# Altium PCB STM32F103C8T6核心板尺寸.PcbDoc
Units mil, origin at the board's own origin, x right, y up, seen from the top; angles counter-clockwise.
Board outline 2100 x 900 mil, 2 copper layers (Top Layer, Bottom Layer); 13 components, 0 nets, 125 pads, 0 vias.
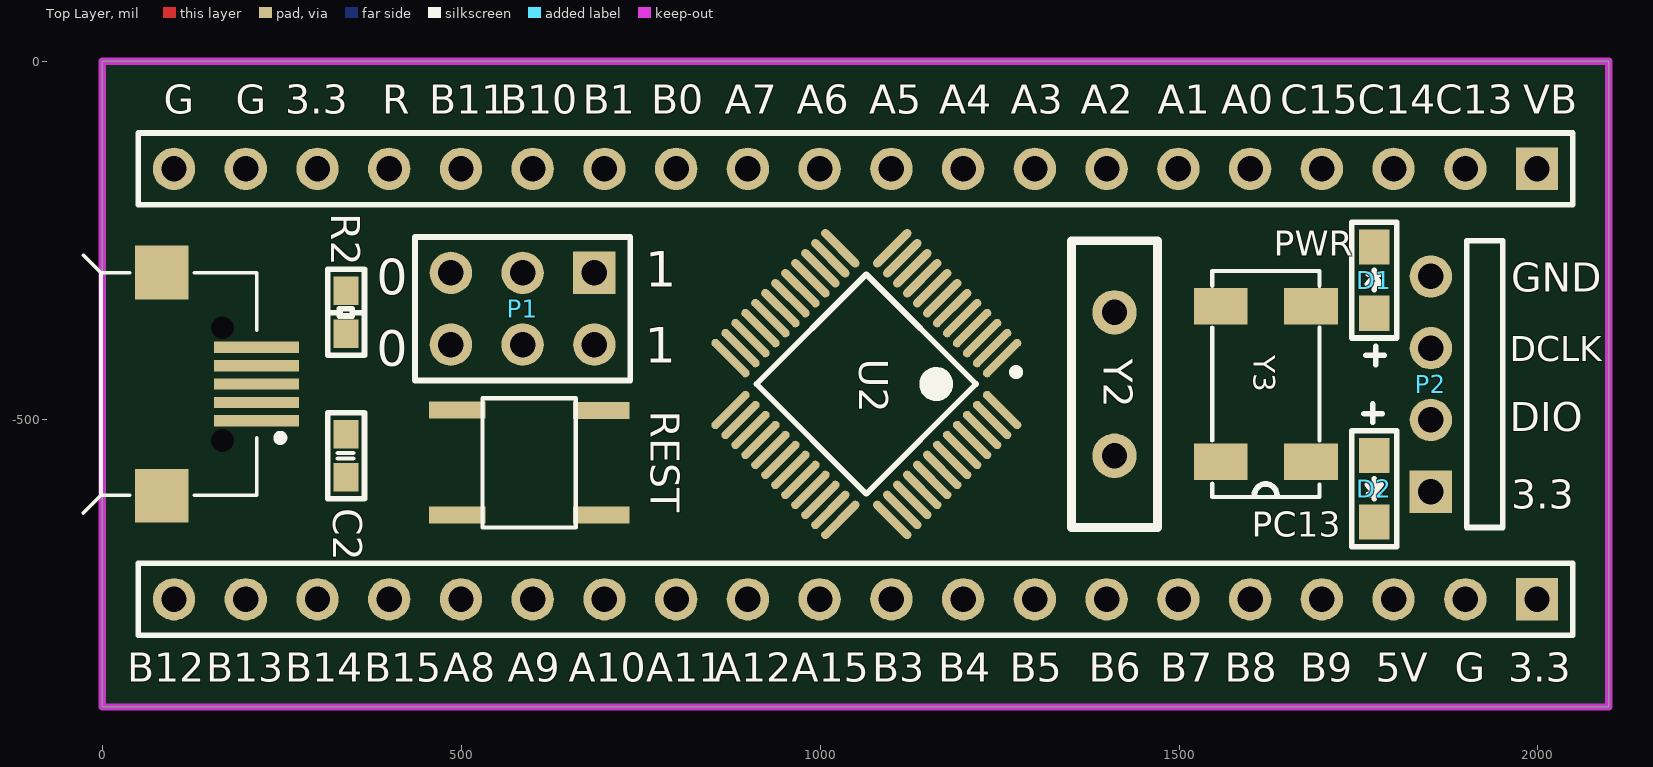
[diagram p0: Top Layer view]
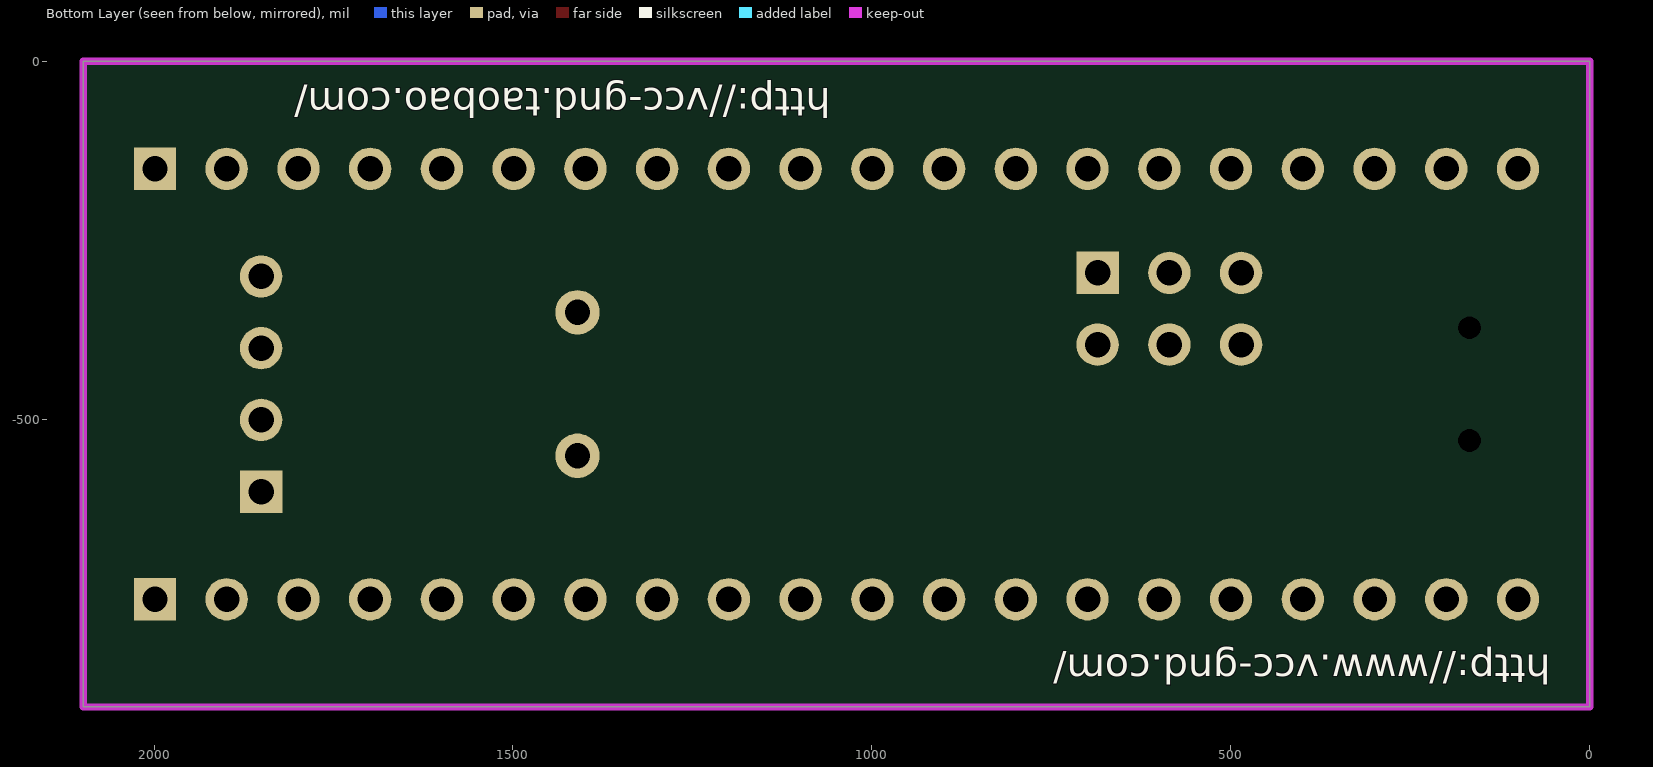
[diagram p1: Bottom Layer view, seen from below]

## Layer stack, top to bottom
Top Layer: signal copper 1.4
Dielectric: dielectric 12.6, FR-4, Dk 4.8
Bottom Layer: signal copper 1.4

## Board outline
1317,-900 -1,-900 -1,-198 -1,0 2098,0 2099,0 2099,-29 2099,-900 1768,-900

## Design rules (kind name [scope] priority, off if disabled: settings)
Clearance [All] p1: gap=6
FabricationTestPointUsage TestPointUsage [All] p1: valid=0 allowmultiple=FALSE
FabricationTestpoint Testpoint [(IsPad And (OnTopLayer Or OnBottomLayer))] p1: side=3 testpointundercomponent=TRUE minsize=40 maxsize=100 preferedsize=60 minholesize=0 maxholesize=40 preferedholesize=32 testpointgrid=1 allowsidetop=TRUE allowsidebottom=TRUE usegrid=TRUE gridtolerance=0.01
HoleToHoleClearance [All] p1: gap=0 allowstackedmicrovias=TRUE
MinimumSolderMaskSliver [All] p1: minsoldermaskwidth=0
PolygonConnect PolygonConnect_1 [All vs (InPadClass('All Pads'))] p1: connectstyle=Relief reliefconductorwidth=20 reliefentries=4 polygonreliefangle="90 Angle" airgapwidth=10
PolygonConnect [All] p2: connectstyle=Direct reliefconductorwidth=20 reliefentries=4 polygonreliefangle="90 Angle" airgapwidth=10
RoutingVias [All] p1: holewidth=15 width=30 viastyle="Through Hole" minholewidth=10 minwidth=20 maxholewidth=50 maxwidth=100
SilkToSilkClearance [All] p1: silktosilkclearance=0
SilkscreenOverComponentPads [All] p1: minsilkscreentomaskgap=0
SolderMaskExpansion [All] p1: expansion=4
Width [All] p1: maxlimit=50 minlimit=10 preferedwidth=10 minimp=50.000000 maximp=50.000000 favimp=50.000000
22 further rules are at their usual default settings.

## Components (designator, comment, footprint, x,y, rotation, side; value= is the part's Value field where it differs from the comment)
C2 "105" C0603 339,-550 r270 top
D1 "LED" LED 1772,-305 r270 top
D2 "LED" LED 1772,-596 r90 top
P1 "Header 3X2" HDR2X3 685,-295 r180 top
P2 "SWD" HDR1X4H 1851,-600 r90 top
P3 "Header 20" HDR1X20 1999,-150 r180 top
P4 "Header 20" HDR1X20 1999,-750 r180 top
R2 "10K" R0603 339,-350 r270 top
REST "" KEY-SMT 594,-560 r180 top (schematic designator SW1)
U2 "STM32F103C8T6" 48P 1064,-450 r225 top locked
Y2 "8MHz" XTAL1 1410,-550 r90 top
Y3 "32.768K" MC-306 1621,-450 r90 top (schematic designator Y1)
? "Comment" Micro_USB 148,-450 r270 top locked

## Footprints (in the part's own frame and the unit in brackets; to place one, negate y for a bottom-side part, rotate by r counter-clockwise, add the part's x,y. Pads: shape width x height; smd on the part's side, far side on the other; paste and mask are expansions set on the pad)
48P [mm]
  oval 1.8x0.3 smd: 1(-4.05,2.75) 2(-4.05,2.25) 3(-4.05,1.75) 4(-4.05,1.25) 5(-4.05,0.75) 6(-4.05,0.25) 7(-4.05,-0.25) 8(-4.05,-0.75) 9(-4.05,-1.25) 10(-4.05,-1.75) 11(-4.05,-2.25) 12(-4.05,-2.75) 25(4.05,-2.75) 26(4.05,-2.25) 27(4.05,-1.75) 28(4.05,-1.25) 29(4.05,-0.75) 30(4.05,-0.25) 31(4.05,0.25) 32(4.05,0.75) 33(4.05,1.25) 34(4.05,1.75) 35(4.05,2.25) 36(4.05,2.75)
  oval 0.3x1.8 smd: 13(-2.75,-4.05) 14(-2.25,-4.05) 15(-1.75,-4.05) 16(-1.25,-4.05) 17(-0.75,-4.05) 18(-0.25,-4.05) 19(0.25,-4.05) 20(0.75,-4.05) 21(1.25,-4.05) 22(1.75,-4.05) 23(2.25,-4.05) 24(2.75,-4.05) 37(2.75,4.05) 38(2.25,4.05) 39(1.75,4.05) 40(1.25,4.05) 41(0.75,4.05) 42(0.25,4.05) 43(-0.25,4.05) 44(-0.75,4.05) 45(-1.25,4.05) 46(-1.75,4.05) 47(-2.25,4.05) 48(-2.75,4.05)
  silkscreen extent -4.17,-2.75 2.75,3.57, body extent -3.5,-3.5 3.5,3.5, height 1.6
C0603 [mil]
  rect 40x35 smd: 1(-29.92,0) 2(29.92,0)
  silkscreen extent -60,-26 60,26
HDR1X4H [mm] "Connector; Header; 4 Position; Right Angle"
  rect 1.5x1.5 hole 0.9: 1(0,0)
  round 1.5 hole 0.9: 2(2.54,0) 3(5.08,0) 4(7.62,0)
  silkscreen extent -1.27,-2.54 8.89,-1.27
HDR1X20 [mm] "Connector; Header; 20 Position"
  rect 1.5x1.5 hole 0.9: 1(0,0)
  round 1.5 hole 0.9: 2(2.54,0) 3(5.08,0) 4(7.62,0) 5(10.16,0) 6(12.7,0) 7(15.24,0) 8(17.78,0) 9(20.32,0) 10(22.86,0) 11(25.4,0) 12(27.94,0) 13(30.48,0) 14(33.02,0) 15(35.56,0) 16(38.1,0) 17(40.64,0) 18(43.18,0) 19(45.72,0) 20(48.26,0)
  silkscreen extent -1.27,-1.27 49.53,1.27
HDR2X3 [mm] "Connector; Header; 3x2 Position"
  rect 1.5x1.5 hole 0.9: 1(0,0)
  round 1.5 hole 0.9: 2(0,2.54) 3(2.54,0) 4(2.54,2.54) 5(5.08,0) 6(5.08,2.54)
  silkscreen extent -1.27,-1.27 6.35,3.81
KEY-SMT [mm]
  rect 2x0.6 smd: 1(-2.55,-1.85) 1(2.55,-1.87) 2(-2.55,1.85) 2(2.55,1.85)
  silkscreen extent -1.65,-2.29 1.65,2.29
LED [mil]
  rect 49x43 smd: 1(46.26,0) 2(-46.26,0)
  silkscreen extent -81,-31 118,31
MC-306 [mm]
  rect 1.3x1.9 smd: 1(-2.75,-1.6) 2(2.75,-1.6) 3(2.75,1.6) 4(-2.75,1.6)
  silkscreen extent -4,-1.9 4,1.9
Micro_USB [mm]
  rect 0.4x3 smd: 1(1.3,1.679) 2(0.65,1.679) 3(0,1.679) 4(-0.65,1.679) 5(-1.3,1.679)
  round 0 hole 0.8 unplated: MH1(2,0.471) MH2(-2,0.471)
  rect 1.9x1.9 smd: ""(-3.95,-1.679) ""(3.95,-1.679)
  silkscreen extent -4.57,-4.46 4.57,2.64
R0603 [mil]
  rect 40x35 smd: 1(-29.92,0) 2(29.92,0)
  silkscreen extent -60,-26 60,26
XTAL1 [mil]
  round 62 hole 35.43: 1(0,0) 2(200,0)
  silkscreen extent -100,-60 300,60

## Part data
P1: "Header, 3-Pin, Dual row"
P2: library part "Header 4", "Header, 4-Pin"
P3 P4: "Header, 20-Pin"
Y3: library part XTAL, "Crystal Oscillat"

## Nets (pads, with @x,y where several pads share a name; then routed paths per layer and width w, separated by ;. In a path a pad name is that pad's centre, name@x,y a point inside that pad or via, vN(x,y) a via of type N, cw(c..) or ccw(c..) an arc to the next point about the centre after c; other vN are vias at no path point)
pads on no net: ?. ?.1 ?.2 ?.3 ?.4 ?.5 ?.MH1 ?.MH2 C2.1 C2.2 D1.1 D1.2 D2.1 D2.2 P1.1 P1.2 P1.3 P1.4 P1.5 P1.6 P2.1 P2.2 P2.3 P2.4 P3.1 P3.2 P3.3 P3.4 P3.5 P3.6 P3.7 P3.8 P3.9 P3.10 P3.11 P3.12 P3.13 P3.14 P3.15 P3.16 P3.17 P3.18 P3.19 P3.20 P4.1 P4.2 P4.3 P4.4 P4.5 P4.6 P4.7 P4.8 P4.9 P4.10 P4.11 P4.12 P4.13 P4.14 P4.15 P4.16 P4.17 P4.18 P4.19 P4.20 R2.1 R2.2 REST.1 REST.2 U2.1 U2.2 U2.3 U2.4 U2.5 U2.6 U2.7 U2.8 U2.9 U2.10 U2.11 U2.12 U2.13 U2.14 U2.15 U2.16 U2.17 U2.18 U2.19 U2.20 U2.21 U2.22 U2.23 U2.24 U2.25 U2.26 U2.27 U2.28 U2.29 U2.30 U2.31 U2.32 U2.33 U2.34 U2.35 U2.36 U2.37 U2.38 U2.39 U2.40 U2.41 U2.42 U2.43 U2.44 U2.45 U2.46 U2.47 U2.48 Y2.1 Y2.2 Y3.1 Y3.2 Y3.3 Y3.4

## Keep-outs
Keep-Out Layer:
  lines w10: -1,-900 -1,-850 -1,-450 -1,0 ; 0,-900 2098,-900 ; 0,0 2098,0 ; 2099,-900 2099,0

## Silkscreen, mask and mechanical layers (free items; w line width, h text height)
Top Overlay:
  text "G" at 85,-73 h40
  text "G" at 185,-73 h40
  text "3.3" at 254,-73 h40
  text "R" at 389,-73 h40
  text "B11" at 455,-73 h40
  text "B10" at 554,-73 h40
  text "B1" at 669,-73 h40
  text "B0" at 764,-73 h40
  text "A7" at 867,-73 h40
  text "A6" at 967,-73 h40
  text "A5" at 1068,-73 h40
  text "A4" at 1166,-73 h40
  text "A3" at 1265.43,-73 h40
  text "A2" at 1363.29,-73 h40
  text "A1" at 1470,-73 h40
  text "A0" at 1559,-73 h40
  text "C15C14C13" at 1641,-73 h40
  text "VB" at 1980,-73 h40
  text "PWR" at 1632,-271 h35
  text "GND" at 1963,-321 h40
  text "DCLK" at 1961,-418 h35
  text "DIO" at 1961,-516 h40
  text "3.3" at 1963,-624 h40
  text "PC13" at 1601,-663 h35
  text "B12" at 34,-865 h40
  text "B13" at 144,-865 h40
  text "B14" at 254,-865 h40
  text "B15" at 364,-865 h40
  text "A8" at 474,-865 h40
  text "A9" at 564,-865 h40
  text "A10" at 649,-865 h40
  text "A11" at 757,-865 h40
  text "A12" at 852,-865 h40
  text "A15" at 960,-865 h40
  text "B3" at 1072,-865 h40
  text "B4" at 1164,-865 h40
  text "B5" at 1264,-865 h40
  text "B6" at 1374,-865 h40
  text "B7" at 1474,-865 h40
  text "B8" at 1564,-865 h40
  text "B9" at 1669,-865 h40
  text "5V" at 1774,-865 h40
  text "G" at 1884,-865 h40
  text "3.3" at 1959,-865 h40
Bottom Overlay:
  text "http://vcc-gnd.taobao.com/" at 1057,-38 h40 r180
  text "http://www.vcc-gnd.com/" at 53,-827 h40 r180

## Dimensions
0,0 to 0,-900 on Top Overlay
99,-150 to 99,-750 on Top Overlay
-1,0 to 2099,0 on Top Overlay
99,-150 to 1999,-150 on Top Overlay

## Text inside footprints (layer, text, board x,y; h text height)
P1: Top Overlay "1" at 756.15,-314.13 h50; Top Overlay "1" at 755,-420 h50; Top Overlay "0" at 425,-275 h50 r180; Top Overlay "0" at 425,-375 h50 r180